# EAGLE board Weigh_scale1 (EAGLE 9.5.2)
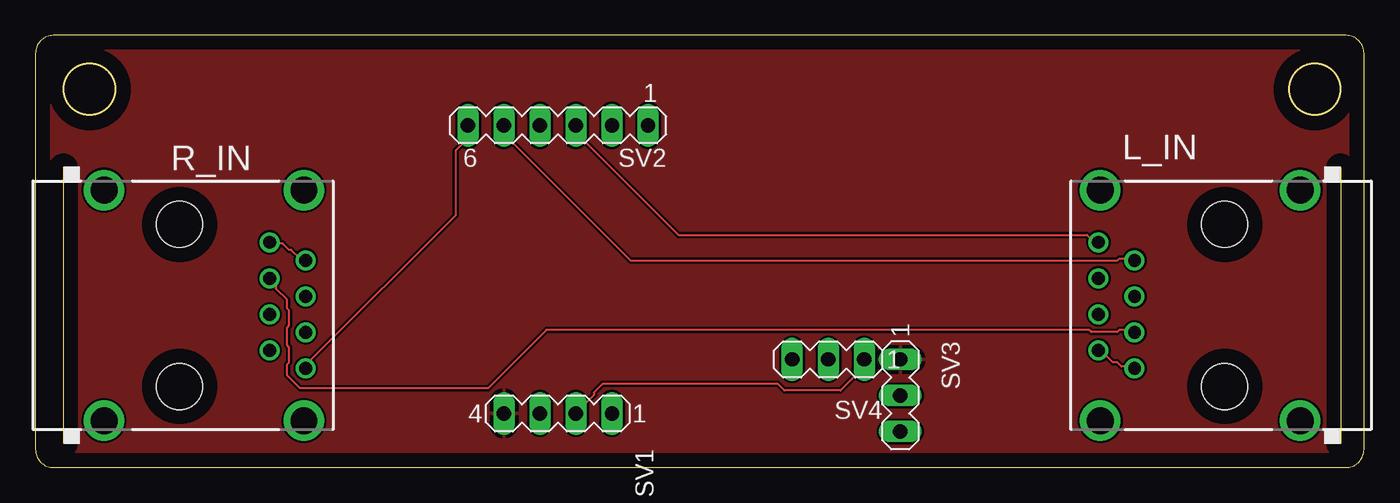
[diagram p0: board, top side]
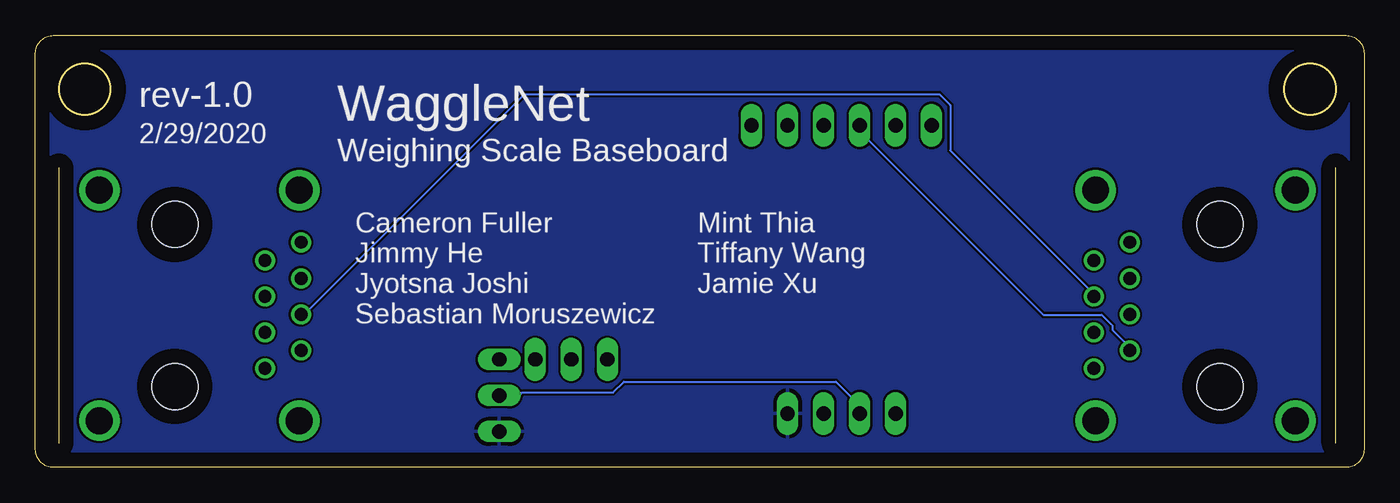
[diagram p1: board, bottom side, seen from below]

Size 93.65 x 30.47 mm. Coordinates in mm from the lower left corner, seen from the top.
Outline: 0,29.21 0,1.27 arc90 1.27,0 92.38,0 arc90 93.65,1.27 93.65,29.21 arc90 92.39,30.47 1.26,30.47 arc90 0,29.21
Outline: circle at 3.81,26.67 radius 1.8
Outline: circle at 90.17,26.67 radius 1.8
Copper layers (1*16): Top 0.035mm / dielectric 1.5mm / Bottom 0.035mm
Design rules "default": minimum track width 6mil, minimum drill 0.35mm, track to track 6mil, track to pad 6mil, pad to pad 6mil, via to via 6mil, smd to smd 6mil, copper to edge 40mil, drill to drill 6mil, minimum pad ring 10mil, minimum via ring 8mil, stop-mask expansion 4mil, vias tented up to drill 0mil, thermal gap 10mil

## Footprints (pad centres in the part's own frame; a part is rotated, then mirrored left to right if it is on the bottom)
RJ45-SHIELD2 = drill 0.9 pad 1.4: 1 -4.445,6.35; 2 -3.175,8.89; 3 -1.905,6.35; 4 -0.635,8.89; 5 0.635,6.35; 6 1.905,8.89; 7 3.175,6.35; 8 4.445,8.89 | drill 1.9 pad 2.5: S1 -8.128,-5.33; S2 8.128,-5.33; S3 -8.128,8.76; S4 8.128,8.76 | hole 3.251: -5.715,0; 5.715,0
MA04-1 = drill 1.016 long: 1 -3.81,0; 2 -1.27,0; 3 1.27,0; 4 3.81,0
MA06-1 = drill 1.016 long: 1 -6.35,0; 2 -3.81,0; 3 -1.27,0; 4 1.27,0; 5 3.81,0; 6 6.35,0
MA03-1 = drill 1.016 long: 1 -2.54,0; 2 0,0; 3 2.54,0

## Placement (x,y rotation side)
L_IN  flip  [RJ45-SHIELD2]  83.82,11.43 90 top
R_IN  flip  [RJ45-SHIELD2]  10.16,11.43 270 top
SV1  [MA04-1]  36.83,3.81 180 top
SV2  [MA06-1]  36.83,24.13 180 top
SV3  [MA03-1]  60.96,5.08 270 top
SV4  [MA03-1]  55.88,7.62 180 top

## Library data of the parts
L_IN R_IN = con-tycoelectronics; MPN: RJ45-6L2-B; OC_FARNELL: unknown; OC_NEWARK: 16R6096
SV1-SV4 = con-lstb; OC_FARNELL: unknown; OC_NEWARK: unknown

## Nets
A+: L_IN.8 SV2.3
A-: R_IN.7 SV2.4
E+: R_IN.8 SV2.6
E-: L_IN.7 SV2.5
GND: SV1.1 SV3.3
HX_DATA: SV1.2 SV4.1
HX_SCK_A2: SV1.3 SV3.2
N$1: L_IN.1 L_IN.2
N$4: R_IN.1 R_IN.2
N$7: L_IN.3 R_IN.3
N$8: L_IN.4 R_IN.4
VCC: SV1.4 SV3.1

## Tracks (layer width: path | path; a pad name or v marks a point on that pad's centre or on a via)
A+
  Top 0.152: L_IN.8 74.88,15.95 74.57,15.95 74.12,16.41 45.31,16.41 38.15,23.57 38.15,24.03 SV2.3
A-
  Bottom 0.152: SV2.4 35.56,23.72 22.61,10.77 18.49,10.77 17.73,10.01 17.73,9.7 16.82,8.79 16.82,8.64 16.51,8.33 R_IN.7
E+
  Top 0.152: R_IN.8 19.1,7.11 19.41,7.42 19.41,7.57 29.62,17.78 29.62,22.35 30.38,23.11 30.38,24.03 SV2.6
E-
  Top 0.152: L_IN.7 77.47,14.73 76.4,14.73 76.25,14.58 41.96,14.58 33.12,23.42 33.12,24.03 SV2.5
GND
  pour Bottom: -5.08,39.37 121.92,39.37 111.76,29.21 111.76,-31.75 7.62,-31.75 -20.32,-3.81 -20.32,24.13
HX_DATA
  Top 0.152: SV4.1 58.42,7.11 56.74,5.44 52.78,5.44 52.32,5.89 39.98,5.89 39.37,5.28 39.37,5.13 38.15,3.91 SV1.2
HX_SCK_A2
  Bottom 0.152: SV1.3 35.56,4.37 37.24,6.04 52.17,6.04 52.93,5.28 59.33,5.28 59.49,5.13 60.86,5.13 SV3.2
N$1
  Top 0.152: L_IN.2 75.03,8.18 75.34,7.87 75.49,7.87 75.95,7.42 76.25,7.42 76.56,7.11 77.47,7.11 L_IN.1
N$4
  Top 0.152: R_IN.1 16.51,15.8 17.42,15.8 17.88,15.34 18.03,15.34 18.64,14.73 18.95,14.73 R_IN.2
N$7
  Top 0.152: R_IN.3 16.51,13.21 16.97,12.75 16.97,12.6 17.73,11.84 17.73,11.23 17.88,11.07 17.88,10.01 17.73,9.86 17.73,8.64 17.88,8.48 17.88,7.42 17.73,7.26 17.73,6.5 18.64,5.59 31.9,5.59 36.02,9.7 74.27,9.7 74.42,9.55 76.25,9.55 76.4,9.7 76.71,9.7 76.86,9.55 77.47,9.55 L_IN.3
N$8
  Bottom 0.152: R_IN.4 19.1,12.14 19.41,12.45 19.41,12.6 29.16,22.35 29.16,25.55 29.92,26.31 59.18,26.31 74.57,10.92 74.88,10.92 L_IN.4
VCC
  pour Top: -2.54,34.29 101.6,34.29 101.6,-3.81 99.06,-6.35 -5.08,-6.35 -2.54,-3.81

## Text on the board
bNames: rev-1.0 | WaggleNet | 2/29/2020 | Weighing Scale Baseboard | Mint Thia / Tiffany Wang / Jamie Xu | Cameron Fuller / Jimmy He / Jyotsna Joshi / Sebastian Moruszewicz